# Altium PCB PCB of SMT32.PcbDoc
Units mil, origin at the board's own origin, x right, y up, seen from the top; angles counter-clockwise.
Board outline 2725 x 965 mil, 2 copper layers (Top Layer, Bottom Layer); 38 components, 26 nets, 159 pads, 97 vias.
Unrouted connection lines stored in the file: 90.
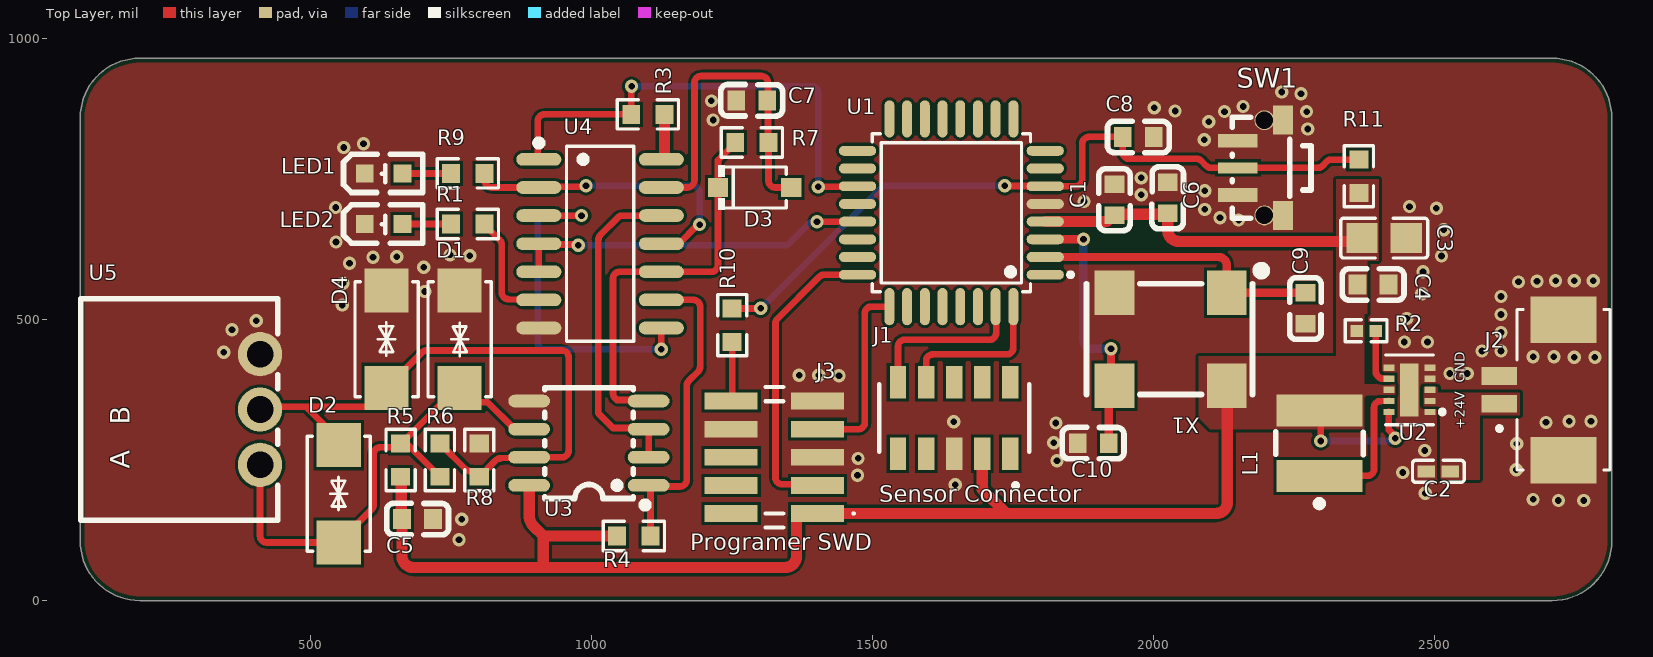
[diagram p0: Top Layer view]
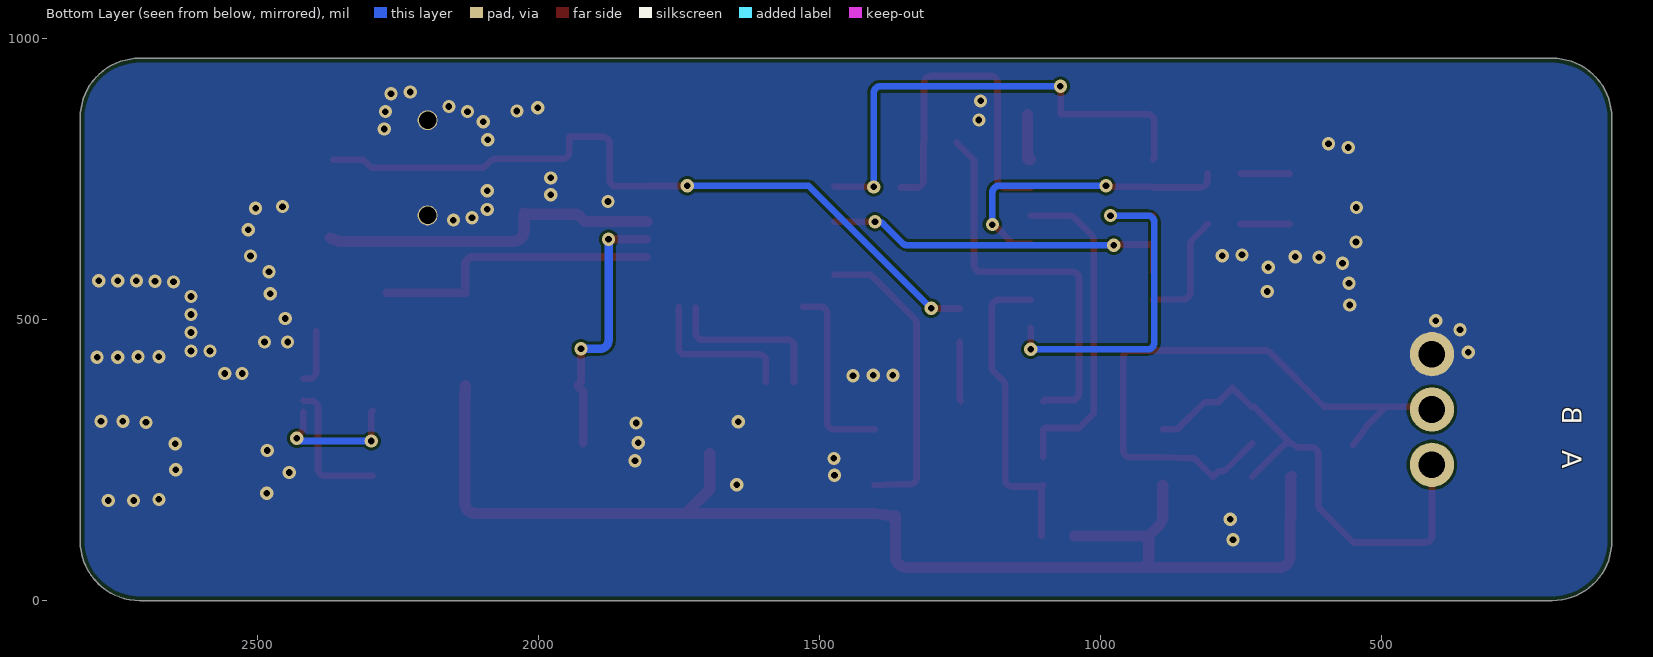
[diagram p1: Bottom Layer view, seen from below]
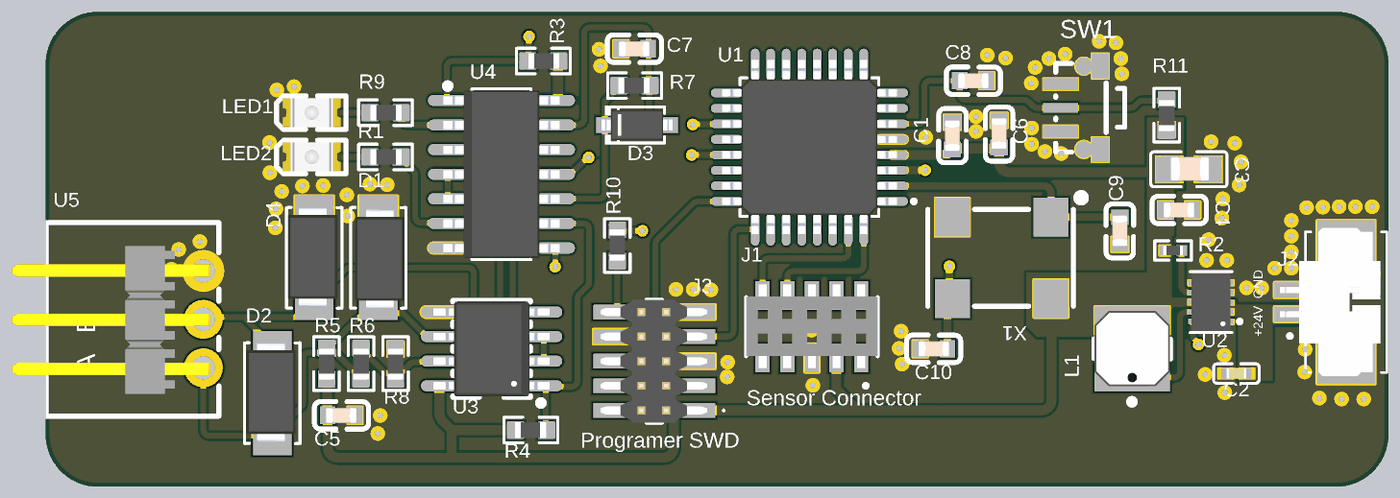
[diagram p2: 3D render of the assembled board from above, using the file's embedded part models]

## Layer stack, top to bottom
Top Solder: solder mask 0.4, Solder Resist, Dk 3.5
Top Layer: signal copper 1.4
Dielectric 1: dielectric 12.6, FR-4, Dk 4.8
Bottom Layer: signal copper 1.4
Bottom Solder: solder mask 0.4, Solder Resist, Dk 3.5

## Board outline
196,0 2709,0 ccw(c2709,106) 2815,106 2815,859 ccw(c2709,859) 2709,965 196,965 ccw(c196,859) 90,859 90,106 ccw(c196,106)

## Design rules (kind name [scope] priority, off if disabled: settings)
BoardOutlineClearance [All] p1: gap=7.87 ignorepadtopadclearanceinfootprint=FALSE
Clearance [All] p1: gap=5 ignorepadtopadclearanceinfootprint=FALSE except(9.84: Arc-Hole Track-Hole SMDPad-Hole THPad-Hole Via-Hole Fill-Hole Poly-Hole Region-Hole Text-Hole)
ComponentClearance [All] p1: gap=5 collisioncheckmode=3 verticalgap=5 showdistances=TRUE
DiffPairsRouting [All] p1: maxlimit=10 minlimit=5 mostfreqgap=5 toplayer_minwidth=5 toplayer_maxwidth=1000 toplayer_prefwidth=5 bottomlayer_minwidth=5 bottomlayer_maxwidth=1000 bottomlayer_prefwidth=5 maxuncoupledlength=500
Height [All] p1: minheight=0 maxheight=71497.94 prefheight=500
HoleSize [All] p1: absolutevalues=TRUE maxlimit=248.03 minlimit=11.81 maxpercent=80.000 minpercent=20.000
HoleToHoleClearance [All] p1: gap=9.84 allowstackedmicrovias=FALSE
MinimumAnnularRing [All] p1: minimumring=3
MinimumSolderMaskSliver [All] p1: minsoldermaskwidth=0
PlaneClearance [All] p1: clearance=5
PlaneConnect PlaneConnectPowerPads [InPadClass('PowerPads')] p1: planeconnectstyle=Direct reliefexpansion=20 reliefentries=4 reliefconductorwidth=10 reliefairgap=10
PlaneConnect [All] p2: pad.planeconnectstyle=Relief pad.reliefexpansion=11.81 pad.reliefentries=4 pad.reliefconductorwidth=5 pad.reliefairgap=5 via.planeconnectstyle=Direct via.reliefexpansion=11.81 via.reliefentries=4 via.reliefconductorwidth=5 via.reliefairgap=5
PolygonConnect PolygonConnect_3 [All vs IsNamedPolygon('NONET_L-01_P-001')] p1: connectstyle=Direct reliefconductorwidth=10 reliefentries=4 polygonreliefangle="90 Angle" airgapwidth=10
PolygonConnect PolygonConnect_2 [All vs IsNamedPolygon('NONET_L-01_P-001')] p2: connectstyle=Direct reliefconductorwidth=10 reliefentries=4 polygonreliefangle="90 Angle" airgapwidth=10
PolygonConnect PolygonConnect_1 [All vs IsNamedPolygon('NONET_L-01_P-001')] p3: connectstyle=Direct reliefconductorwidth=10 reliefentries=4 polygonreliefangle="90 Angle" airgapwidth=10
PolygonConnect PolygonConnectPowerPads [All vs (InPadClass('PowerPads'))] p4: connectstyle=Direct reliefconductorwidth=10 reliefentries=4 polygonreliefangle="90 Angle" airgapwidth=10
PolygonConnect [All] p5: thpad.connectstyle=Relief thpad.reliefconductorwidth=5 thpad.reliefentries=4 thpad.polygonreliefangle="90 Angle" thpad.airgapwidth=5 smdpad.connectstyle=Relief smdpad.reliefconductorwidth=5 smdpad.reliefentries=4 smdpad.polygonreliefangle="90 Angle" smdpad.airgapwidth=5 via.connectstyle=Direct via.reliefconductorwidth=5 via.reliefentries=4 via.polygonreliefangle="90 Angle" via.airgapwidth=5
RoutingVias [All] p1: holewidth=11.81 width=23.62 viastyle="Through Hole" minholewidth=11.81 minwidth=23.62 maxholewidth=23.62 maxwidth=259.84
SilkToSilkClearance [All] p1: silktosilkclearance=0
SilkToSolderMaskClearance [IsPad] p1: minsilkscreentomaskgap=5 clearancetoexposedcopper=TRUE
SolderMaskExpansion [All] p1: expansion=2.95 istentingtop=FALSE
Width [All] p1: maxlimit=1000 minlimit=5 preferedwidth=5 minimp=50.000000 maximp=50.000000 favimp=50.000000
20 further rules are at their usual default settings.

## Classes and differential pairs
component class SoC: C1 C6 C8 C9 C10 J3 R10 R11 SW1 U1 X1
component class Buck_Converter: C2 C3 C4 C5 C7 D1 D2 D3 D4 J1 J2 L1 LED1 LED2 R1 R2 R3 R4 R5 R6 R7 R8 R9 U2 U3 U4 U5

## Components (designator, comment, footprint, x,y, rotation, side; value= is the part's Value field where it differs from the comment)
C1 "100nF" "CAP 100NF 16V" 1930,713 r270 top
C2 "2.2uF" "CAP 2.2UF" 2506.46,230 r0 top
C3 "22uF" "CAP 22UF" 2410,645 r180 top
C4 "1uF" "CAP 1UF" 2390.06,562.5 r180 top
C5 "1uF" "CAP 1UF" 690,145 r180 top
C6 "4.7uF" "CAP 4.7UF" 2025,716.84 r90 top
C7 "100pF" "CAP 100PF" 1285,890 r0 top
C8 "100nF" "CAP 100NF 16V" 1972.45,825 r180 top
C9 "10pF" "CAP 10PF" 2270,520 r90 top
C10 "10pF" "CAP 10PF" 1892.44,280 r0 top
D1 "SMAJ58CA" "TVS DIODE" 765,465 r90 top
D2 "SMAJ58CA" "TVS DIODE" 550,190 r270 top
D3 "1N4148W" 1N4148W 1290,735 r0 top
D4 "SMAJ58CA" "TVS DIODE" 635,465 r270 top
J1 "CLP-105-02-L-D" "SESNOR CONNECTOR" 1645,325 r0 top
J2 "Power Connector" "POWER CONNECTOR" 2615,375 r90 top
J3 "20021121-00010C4LF" JTAG 1325,255 r90 top
L1 "LPS4018-103MRC" INDUCTOR 2295,280 r90 top
LED1 "VLMS1300-GS08" LED 630,760 r0 top
LED2 "VLMS1300-GS08" LED 630,670 r0 top
R1 "470Ω" "RES 470R" 779.65,670 r0 top
R2 "100K" "RES 100K" 2377.96,480 r180 top value=100kΩ
R3 "4.7K" "RES 4.7K" 1100,865 r0 top value=4.7kΩ
R4 "4.7K" "RES 4.7K" 1075,115 r180 top value=4.7kΩ
R5 "4.7K" "RES 4.7K" 660,250 r270 top value=4.7kΩ
R6 "120R" "RES 120R" 730,250 r270 top value=120Ω
R7 "56K" "RS 56K" 1285,815 r180 top value=56kΩ
R8 "4.7K" "RES 4.7K" 800,250 r270 top value=4.7kΩ
R9 "470Ω" "RES 470R" 779.65,760 r0 top
R10 "10k" "RES 10K" 1250,490 r90 top
R11 "10k" "RES 10K" 2365,755 r270 top
SW1 "TSA020B3418A02" "PUSH BUTTON" 2190,770 r90 top
U1 "STM32G030K8T6" STM32G030K8T6 1640,690 r90 top
U2 "TPS62177DQCR" TPS62177DQCR 2455,375 r90 top
U3 "ST3485EBDR" ST3485EBDR 995,280 r90 top
U4 "74HC14D,653" 74HC14D 1015,635 r270 top
U5 "733-363" "RS485 CONNECTOR" 410,340.01 r270 top
X1 "32Mhz" "CRYSTAL 32MHZ" 2030,465 r180 top value=32MHz

## Footprints (in the part's own frame and the unit in brackets; to place one, negate y for a bottom-side part, rotate by r counter-clockwise, add the part's x,y. Pads: shape width x height; smd on the part's side, far side on the other; paste and mask are expansions set on the pad)
1N4148W [mm]
  rect 0.91x0.84 smd paste+0 mask+0.051: 1(-1.655,0) 2(1.655,0)
  silkscreen extent -1.65,-1 1.43,1, body extent -1.83,-0.77 1.83,0.77, height 1.45
74HC14D [mil]
  oval 22.6x80.24 smd paste+0 mask+2: 1(-150,-109.02) 2(-100,-109.02) 3(-50,-109.02) 4(0,-109.02) 5(50,-109.02) 6(100,-109.02) 7(150,-109.02) 8(150,109.01) 9(100,109.01) 10(50,109.01) 11(0,109.01) 12(-50,109.01) 13(-100,109.01) 14(-150,109.01)
  silkscreen extent -185,-115 173,60, body extent -170,-118 171,118, height 69
"CAP 1UF" [mm]
  rect 0.8x0.9 smd paste+0 mask+0.051: 1(-0.7,0) 2(0.7,0)
  silkscreen extent -1.41,-0.71 1.39,0.72, body extent -0.8,-0.39 0.8,0.41, height 0.81
"CAP 2.2UF" [mm]
  rect 0.79x0.54 smd paste-100 mask+0.051: 1(-0.545,0) 2(0.545,0)
  silkscreen extent -1.17,-0.5 1.17,0.5, body extent -0.5,-0.27 0.5,0.28, height 0.5
"CAP 4.7UF" [mm]
  rect 0.8x0.9 smd paste+0 mask+0.051: 1(-0.7,0) 2(0.7,0)
  silkscreen extent -1.41,-0.71 1.39,0.72, body extent -0.77,-0.4 0.83,0.4, height 0.81
"CAP 10PF" [mm]
  rect 0.8x0.9 smd paste+0 mask+0.051: 1(-0.7,0) 2(0.7,0)
  silkscreen extent -1.41,-0.71 1.39,0.72, body extent -0.8,-0.4 0.8,0.4, height 0.81
"CAP 22UF" [mm]
  rect 1.41x1.35 smd paste-100 mask+0.051: 1(-1,0) 2(1,0)
  silkscreen extent -1.96,-0.9 1.96,0.9, body extent -1.05,-0.65 0.95,0.6, height 0.61
"CAP 100NF 16V" [mm]
  rect 0.8x0.9 smd paste+0 mask+0.051: 1(-0.7,0) 2(0.7,0)
  silkscreen extent -1.41,-0.71 1.39,0.72, body extent -0.81,-0.4 0.79,0.4, height 0.81
"CAP 100PF" [mm]
  rect 0.8x0.9 smd paste+0 mask+0.051: 1(-0.7,0) 2(0.7,0)
  silkscreen extent -1.41,-0.71 1.39,0.72, body extent -0.81,-0.41 0.79,0.39, height 0.81
"CRYSTAL 32MHZ" [mm]
  rect 1.8x2 smd paste+0 mask+0.051: 1(-2.54,-2.1) 2(2.54,-2.1) 3(2.54,2.1) 4(-2.54,2.1)
  silkscreen extent -4.3,-3.3 3.8,2.5
INDUCTOR [mm]
  rect 1.45x3.9 smd paste+0 mask+0.051: 1(-1.475,0) 2(1.475,0)
  silkscreen extent -2.88,-1.97 0.52,1.97, body extent -1.93,-1.95 1.97,1.95, height 1.8
JTAG [mm]
  rect 0.76x2.4 smd: 1(-2.54,-1.95) 2(-2.54,1.95) 3(-1.27,-1.95) 4(-1.27,1.95) 5(0,-1.95) 6(0,1.95) 7(1.27,-1.95) 8(1.27,1.95) 9(2.54,-1.95) 10(2.54,1.95)
  silkscreen extent -3.17,-3.63 3.17,0.4, body extent -3.17,-2.72 3.17,2.78, height 4.55
LED [mm]
  rect 0.8x0.8 smd paste+0 mask+0.051: 1(0.851,0) 2(-0.851,0)
  silkscreen extent -1.82,-0.86 1.77,0.86, body extent -1.5,-0.75 1.5,0.75, height 1.5
"POWER CONNECTOR" [mm]
  rect 0.8x1.6 smd: 1(-0.625,0) 2(0.625,0)
  rect 2.1x3 smd: S1(-3.175,-2.9) S2(3.175,-2.9)
  silkscreen extent -3.62,-5 3.62,0.1, body extent -3.83,-4.67 3.83,0.53, height 3.4
"PUSH BUTTON" [mm]
  rect 0.625x1.8 smd paste-100 mask+0.051: 1(-1.225,1.025) 3(1.225,1.025)
  rect 0.5x1.8 smd paste-100 mask+0.051: 2(0,1.025)
  rect 1.3x0.9 smd paste-100 mask+0.051: 4(-2.159,-1.025) 5(2.159,-1.025)
  round 0.9 hole 0.8 paste-2539.97 mask+0.05: 6(2.15,-0.175) 7(-2.15,-0.175)
  silkscreen extent -2.29,-2.28 2.29,1.27
"RES 4.7K" [mil]
  rect 31.75x34.02 smd paste-3937.01 mask+2: 1(-29.66,0) 2(29.66,0)
  silkscreen extent -55,-26 55,26, body extent -30,-16 32,16, height 18
"RES 10K" [mil]
  rect 31.75x34.02 smd paste-3937.01 mask+2: 1(-29.66,0) 2(29.66,0)
  silkscreen extent -55,-26 55,26, body extent -30,-16 32,16, height 18
"RES 100K" [mm]
  rect 0.566x0.54 smd paste-100 mask+0.051: 1(-0.433,0) 2(0.433,0)
  silkscreen extent -0.94,-0.5 0.94,0.5, body extent -0.5,-0.25 0.5,0.25, height 0.35
"RES 120R" [mil]
  rect 31.75x34.02 smd paste-3937.01 mask+2: 1(-29.66,0) 2(29.66,0)
  silkscreen extent -55,-26 55,26, body extent -30,-16 32,16, height 18
"RES 470R" [mil]
  rect 31.75x34.02 smd paste-3937.01 mask+2: 1(-29.65,0) 2(29.65,0)
  silkscreen extent -55,-26 55,26, body extent -30,-16 32,16, height 18
"RS485 CONNECTOR" [mm]
  round 2 hole 1.2: 1(-2.5,0) 2(0,0) 3(2.5,0)
  silkscreen extent -5,-8.1 5,0.8, body extent -3.78,-9.86 3.84,0.36, height 3
"RS 56K" [mil]
  rect 31.75x34.02 smd paste-3937.01 mask+2: 1(-29.66,0) 2(29.66,0)
  silkscreen extent -55,-26 55,26, body extent -30,-16 32,16, height 18
"SESNOR CONNECTOR" [mm]
  rect 0.74x1.47 smd: 1(2.54,-1.615) 2(2.54,1.615) 3(1.27,-1.615) 4(1.27,1.615) 5(0,-1.615) 6(0,1.615) 7(-1.27,-1.615) 8(-1.27,1.615) 9(-2.54,-1.615) 10(-2.54,1.615)
  silkscreen extent -3.39,-3.15 3.39,1.53, body extent -3.39,-2.13 3.39,2.18, height 2.29
ST3485EBDR [mil]
  oval 22.6x74.33 smd: 1(-75,-106.26) 2(-25,-106.26) 3(25,-106.26) 4(75,-106.26) 5(75,106.26) 6(25,106.26) 7(-25,106.26) 8(-75,106.26)
  silkscreen extent -116,-106 98,79, body extent -96,-118 96,118, height 69
STM32G030K8T6 [mm]
  oval 0.448x1.684 smd paste+0 mask+0.051: 1(-2.8,-4.242) 2(-2,-4.242) 3(-1.2,-4.242) 4(-0.4,-4.242) 5(0.4,-4.242) 6(1.2,-4.242) 7(2,-4.242) 8(2.8,-4.242) 17(2.8,4.242) 18(2,4.242) 19(1.2,4.242) 20(0.4,4.242) 21(-0.4,4.242) 22(-1.2,4.242) 23(-2,4.242) 24(-2.8,4.242)
  oval 1.684x0.448 smd paste+0 mask+0.051: 9(4.242,-2.8) 10(4.242,-2) 11(4.242,-1.2) 12(4.242,-0.4) 13(4.242,0.4) 14(4.242,1.2) 15(4.242,2) 16(4.242,2.8) 25(-4.242,2.8) 26(-4.242,2) 27(-4.242,1.2) 28(-4.242,0.4) 29(-4.242,-0.4) 30(-4.242,-1.2) 31(-4.242,-2) 32(-4.242,-2.8)
  silkscreen extent -3.58,-5.48 3.58,3.58, body extent -4.5,-4.5 4.5,4.5, height 1.6
TPS62177DQCR [mm]
  rect 0.28x0.505 smd paste+0 mask+0.051: 1(-1,-0.928) 2(-0.5,-0.928) 3(0,-0.928) 4(0.5,-0.928) 5(1,-0.928) 6(1,0.928) 7(0.5,0.928) 8(0,0.928) 9(-0.5,0.928) 10(-1,0.928)
  rect 2.4x0.84 smd paste+0 mask+0.051: 11(0,0)
  silkscreen extent -1.58,-1.58 1.58,1.08, body extent -1.5,-1 1.5,1, height 0.8
"TVS DIODE" [mm]
  rect 2x2 smd: 1(-2.2,0) 2(2.2,0)
  silkscreen extent -2.6,-1.43 2.6,1.43, body extent -2.62,-1.36 2.52,1.2, height 2.5

## Part data
C1 C8: library part "Cap 100nF", "16V 100nF X7R ±10% 0603 Multilayer Ceramic Capacitors MLCC - SMD/SMT ROHS", JLCPCB Part Class="Extended Part", Manufacturer=muRata(村田), Manufacturer Part=GRM188R71C104KA01D, nameAlias=Value, spicePre=C, spiceSymbolName=GRM188R71C104KA01D, Supplier=LCSC, Supplier Part=C45000
C2: library part GRM155R6YA225KE11D, "Cap 2.2uF 35V", JLCPCB Part Class="Extended Part", LCSC Part Name="2.2uF ±10% 35V", Manufacturer=muRata(村田), Tolerance=±10%, Add into BOM=yes, Convert to PCB=yes, Datasheet=https://atta.szlcsc.com/upload/public/pdf/source/20200305/C490387_23319AE8C154DEB24C505E6C82A8106A.pdf, Device=GRM155R6YA225KE11D, Manufacturer Part=GRM155R6YA225KE11D, Supplier=LCSC, Supplier Footprint=0402, Supplier Part=C237392, Symbol=GRM155R6YA225KE11D
C3: library part GRM21BC81C226ME44L, "Cap 22uF 16V", JLCPCB Part Class="Extended Part", LCSC Part Name="22uF ±20% 16V", Manufacturer=muRata(村田), Tolerance=±20%, Add into BOM=yes, Convert to PCB=yes, Datasheet=https://atta.szlcsc.com/upload/public/pdf/source/20200117/C258782_354729B55DBAD136BAA783E298FE5367.pdf, Device=GRM21BC81C226ME44L, Manufacturer Part=GRM21BC81C226ME44L, Supplier=LCSC, Supplier Footprint=0805, Supplier Part=C258782, Symbol=GRM21BC81C226ME44L
C4 C5: library part GCM188R71C105KA64D, "Cap 1uF 16V", JLCPCB Part Class="Extended Part", LCSC Part Name="1uF ±10% 16V", Manufacturer=muRata(村田), Tolerance=±10%, Add into BOM=yes, Convert to PCB=yes, Datasheet=https://atta.szlcsc.com/upload/public/pdf/source/20181221/C161212_C96DD77354D5551432B3B7779E4D1948.pdf, Device=GCM188R71C105KA64D, Manufacturer Part=GCM188R71C105KA64D, Supplier=LCSC, Supplier Footprint=0603, Supplier Part=C161212, Symbol=GCM188R71C105KA64D
C6: library part GRM188C71C475KE21D, "16V 4.7uF X7S ±10% 0603 Multilayer Ceramic Capacitors MLCC - SMD/SMT ROHS", JLCPCB Part Class="Extended Part", LCSC Part Name="4.7uF ±10% 16V", Manufacturer=muRata(村田), Tolerance=±10%, Add into BOM=yes, Convert to PCB=yes, Datasheet=https://atta.szlcsc.com/upload/public/pdf/source/20200305/C490387_23319AE8C154DEB24C505E6C82A8106A.pdf, Device=GRM188C71C475KE21D, Manufacturer Part=GRM188C71C475KE21D, Supplier=LCSC, Supplier Footprint=0603, Supplier Part=C237615, Symbol=GRM188C71C475KE21D
C7: "Cap 100pF 50V", JLCPCB Part Class="Extended Part", Manufacturer=muRata(村田), Manufacturer Part=GCM1885C1H101JA16D, nameAlias=Value, spicePre=C, spiceSymbolName=GCM1885C1H101JA16D, Supplier=LCSC, Supplier Part=C126543
C9 C10: library part "Cap 10pF", "25V 10pF NP0 ±5% 0603  Multilayer Ceramic Capacitors MLCC - SMD/SMT ROHS", JLCPCB Part Class="Extended Part", LCSC Part Name="10pF ±5% 25V", Manufacturer=YAGEO(国巨), Manufacturer Part=CC0603JRNPO8BN100, Tolerance=±5%, Add into BOM=yes, Convert to PCB=yes, Datasheet=https://atta.szlcsc.com/upload/public/pdf/source/20210519/C1853175_08ABFC5682B471E6C773F36F7C78F8CE.pdf, Device=CC0603JRNPO8BN100, Supplier=LCSC, Supplier Footprint=0603, Supplier Part=C1853175, Symbol=CC0603JRNPO8BN100
D1 D2 D4: library part SMAJ58CA_C148235, Breakdown Voltage=64.4V, JLCPCB Part Class="Extended Part", Manufacturer=Littelfuse(美国力特), Maximum Clamping Voltage=93.6V, Peak Pulse Current (Ipp)=4.3A, Peak Pulse Power Dissipation (Ppp)=400W, Reverse Stand-Off Voltage (Vrwm)=58V, Add into BOM=yes, Convert to PCB=yes, Datasheet=https://atta.szlcsc.com/upload/public/pdf/source/20190402/C374025_5ACE77BC72947DF13CF0CBC7F8B57228.pdf, Device=SMAJ58CA_C148235, LCSC Part Name=SMAJ58CA, Manufacturer Part=SMAJ58CA, Supplier=LCSC, Supplier Footprint=SMA(DO-214AC), Supplier Part=C148235, Symbol=SMAJ58CA_C148235, Type=TVS
D3: Forward Voltage (Vf@If)=1.25V@150mA, JLCPCB Part Class="Extended Part", LCSC Part Name="电压:100V 电流:150mA", Manufacturer=Agertech(艾吉芯), Operating Temperature=-55℃~+150℃@(Tj), Reverse Leakage Current=1uA@75V, Add into BOM=yes, Convert to PCB=yes, Datasheet=https://atta.szlcsc.com/upload/public/pdf/source/20210624/C2840961_71DFB6950E76A457E5EE196072A9BD23.pdf, Device=1N4148W_C2840961, Manufacturer Part=1N4148W, Supplier=LCSC, Supplier Footprint=SOD-123W, Supplier Part=C2840961, Symbol=1N4148W_C2840961
J1: "1.27mm 1.27mm Double Row Tin 3.3A -55℃~+125℃ 10P Standing paste 2.29mm SMD,P=1.27mm Female Headers ROHS", Package=None, Availability=Unavailable, MP=CLP-105-02-L-D, Price=None
J2: "Picoblade Connector, 2 Circuit Single Row, Right Angle Surface Mount SMT PCB", Package=None, Availability=Unavailable, MF="{'manufacturer': u'Molex'}", MP=0532610271, Price=None
J3: library part JTAG, "Headers & Wire Housings 1.27x1.27mm BTB, Hdr Unshrd, SMT, 10 Pos", Manufacturer_Name=Amphenol, Mouser Part Number=649-202112100010C4LF, Datasheet Link=https://cdn.amphenol-cs.com/media/wysiwyg/files/drawing/20021121.pdf, Geometry.Height=5.7mm, Manufacturer_Part_Number=20021121-00010C4LF, Mouser Price/Stock=https://www.mouser.co.uk/ProductDetail/Amphenol-FCI/20021121-00010C4LF?qs=iIVTEDlrHA1ddfCJGH4Nhg%3D%3D
L1: "Inductor 10uH", JLCPCB Part Class="Extended Part", Manufacturer=Coilcraft(线艺), Add into BOM=yes, Convert to PCB=yes, Datasheet=https://atta.szlcsc.com/upload/public/pdf/source/20220705/4A26DAB81CB6B332CC15AA1D7F647266.pdf, Device=LPS4018-103MRC, LCSC Part Name=LPS4018-103MRC, Manufacturer Part=LPS4018-103MRC, Supplier=LCSC, Supplier Footprint=SMD,3.9x3.9mm, Supplier Part=C6127589, Symbol=LPS4018-103MRC
LED1 LED2: "Led", JLCPCB Part Class="Extended Part", Manufacturer=VISHAY(威世), Contributor=LCSC, Manufacturer Part=VLMS1300-GS08, spicePre=L, spiceSymbolName=VLMS1300-GS08, Supplier=LCSC, Supplier Part=C83242
R1 R9: "Res 470R", JLCPCB Part Class="Extended Part", Manufacturer=PANASONIC(松下), Manufacturer Part=ERJPA3F4700V, Contributor=lcsc, nameAlias=Value, spicePre=R, spiceSymbolName=ERJPA3F4700V, Supplier=LCSC, Supplier Part=C441919
R2: library part ERA2AEB104X, "Res 100K 50V", JLCPCB Part Class="Extended Part", LCSC Part Name="100kΩ ±0.1% 63mW 薄膜电阻", Manufacturer=PANASONIC(松下), Operating Temperature Range=-55℃~+155℃, Temperature Coefficient=±25ppm/℃, Tolerance=±0.1%, Add into BOM=yes, Convert to PCB=yes, Device=ERA2AEB104X, Manufacturer Part=ERA2AEB104X, Supplier=LCSC, Supplier Footprint=0402, Supplier Part=C445619, Symbol=ERA2AEB104X, Type="Thin Film Resistor"
R3 R4 R5 R8: library part ERJPA3F4701V, "Res 4.7K", JLCPCB Part Class="Extended Part", LCSC Part Name="4.7kΩ ±1% 333mW 厚膜电阻", Manufacturer=PANASONIC(松下), Operating Temperature Range=-55℃~+155℃, Overload Voltage (Max)=-, Power(Watts)=333mW, Temperature Coefficient=±100ppm/℃, Tolerance=±1%, Add into BOM=yes, Convert to PCB=yes, Device=ERJPA3F4701V, Manufacturer Part=ERJPA3F4701V, Supplier=LCSC, Supplier Footprint=0603, Supplier Part=C441924, Symbol=ERJPA3F4701V, Type="Thick Film Resistors"
R6: library part ERJPA3F1200V, "Res 120R", JLCPCB Part Class="Extended Part", LCSC Part Name="120Ω ±1% 250mW 厚膜电阻", Manufacturer=PANASONIC(松下), Operating Temperature Range=-55℃~+155℃, Overload Voltage (Max)=-, Power(Watts)=250mW, Temperature Coefficient=±100ppm/℃, Tolerance=±1%, Add into BOM=yes, Convert to PCB=yes, Datasheet=https://atta.szlcsc.com/upload/public/pdf/source/20200515/C543414_D3FB4A44C151AC19BA141503575FC797.pdf, Device=ERJPA3F1200V, Manufacturer Part=ERJPA3F1200V, Supplier=LCSC, Supplier Footprint=0603, Supplier Part=C543338, Symbol=ERJPA3F1200V, Type="Thick Film Resistors"
R7: library part ERJ3EKF5602V, "Res 56K", JLCPCB Part Class="Extended Part", LCSC Part Name="56kΩ ±1% 100mW 厚膜电阻", Manufacturer=PANASONIC(松下), Operating Temperature Range=-55℃~+155℃, Overload Voltage (Max)=-, Temperature Coefficient=±100ppm/℃, Tolerance=±1%, Add into BOM=yes, Convert to PCB=yes, Datasheet=https://atta.szlcsc.com/upload/public/pdf/source/20181114/C278629_181D62B106189050D6A2EF7256E211B4.pdf, Device=ERJ3EKF5602V, Manufacturer Part=ERJ3EKF5602V, Supplier=LCSC, Supplier Footprint=0603, Supplier Part=C278629, Symbol=ERJ3EKF5602V, Type="Thick Film Resistors"
R10 R11: library part ERJ-PA3F1002V_1, "RES SMD 10K OHM 1% 1/4W 0603", Digi-Key Part Number=P10KBYCT-ND, Manufacturer="Panasonic Electronic Components", Operating Temperature="-55°C ~ 155°C", Package / Case="0603 (1608 Metric)", Part Number=ERJ-PA3F1002V, Power (Watts)="0.25W, 1/4W", Supplier Device Package=0603, Temperature Coefficient=±100ppm/°C, Tolerance=±1%, @ qty=1500, Composition="Thick Film", Datasheets=https://industrial.panasonic.com/cdbs/www-data/pdf/RDA0000/AOA0000C243.pdf, Factory Stock=0, Failure Rate=-, Features="Automotive AEC-Q200, Pulse Withstanding", Height - Seated (Max)="0.022\" (0.55mm)", Image=//media.digikey.com/Photos/Panasonic%20Photos/MFG_ERJ-P6W%20Series.jpg, Minimum Quantity=1, Number of Terminations=2, Packaging="Cut Tape (CT)", Part Status=Active, Quantity Available=12488, Series=ERJ, Size / Dimension="0.063\" L x 0.031\" W (1.60mm x 0.80mm)", Unit Price (USD)=0.02372
SW1: library part "Push Button", Contact Current=50mA, JLCPCB Part Class="Extended Part", LCSC Part Name="4.5*3.4*3.4mm 卧贴 轻触开关", Manufacturer=BZCN(博众电气), Operating Force=180gf, Voltage Rating (AC)=-, Voltage Rating (DC)=12V, Actuator Style="Round Button", Add into BOM=yes, Convert to PCB=yes, Datasheet=https://atta.szlcsc.com/upload/public/pdf/source/20210826/A0412DE55436A0A9154118D90A036ADB.pdf, Device=TSA020B3418A02, Manufacturer Part=TSA020B3418A02, Mechanical Life=-, Mounting Style="Surface Mount", Supplier=LCSC, Supplier Footprint=SMD, Supplier Part=C2888897, Switch Height=3.4mm, Switch Length=4.5mm, Switch Width=3.4mm, Symbol=TSA020B3418A02
U1: JLCPCB Part Class="Extended Part", Manufacturer=ST(意法半导体), Contributor=LCSC, Manufacturer Part=STM32G030K8T6, spicePre=U, spiceSymbolName=STM32G030K8T6, Supplier=LCSC, Supplier Part=C431631
U2: Input Voltage=-, JLCPCB Part Class="Extended Part", Manufacturer=TI(德州仪器), Add into BOM=yes, Convert to PCB=yes, Datasheet=https://www.ti.com/cn/lit/gpn/tps62177, Device=TPS62177DQCR, Function="Step-down type", LCSC Part Name=TPS62177DQCR, Manufacturer Part=TPS62177DQCR, Number of Outputs=-, Output Current (Max)=-, Supplier=LCSC, Supplier Footprint=WSON-10-EP(2x3), Supplier Part=C91241, Switch tube (built-in/external)=内置, Switching Frequency=-, Symbol=TPS62177DQCR, Synchronous Rectification=-, Topology=-
U3: JLCPCB Part Class="Extended Part", LCSC Part Name="3.3V供电 15Mbps 带静电保护收发器", Manufacturer=ST(意法半导体), Operating Temperature=-40℃~+85℃, Supply Voltage=3V~3.6V, Add into BOM=yes, Convert to PCB=yes, Data Rate=15Mbps, Datasheet=https://atta.szlcsc.com/upload/public/pdf/source/20181012/C75809_EC9EE9FC1B4AC7950854237FAEE73CA1.pdf, Device=ST3485EBDR, Driver/receiver=1/1, ESD Protect=±12kV, Manufacturer Part=ST3485EBDR, Node Number=64, Supplier=LCSC, Supplier Footprint=SO-8, Supplier Part=C75809, Symbol=ST3485EBDR, Types=transceiver, Whether the isolation=NO
U4: JLCPCB Part Class="Basic Part", Manufacturer=Nexperia(安世), Manufacturer Part=74HC14D,653, spicePre=X, spiceSymbolName=74HC14D,653, Supplier=LCSC, Supplier Part=C5605
U5: library part "RS485 Connector", "6A 3 Straight Needle -60℃~+100℃ 1 2.5mm Gray Plugin,P=2.5mm  Pluggable System Terminal Block ROHS", Color=Gray, Current Rating (Max)=6A, JLCPCB Part Class="Extended Part", LCSC Part Name="2.5mm 排数:1 每排P数:3", Manufacturer=WAGO(万可), Operating Temperature Range=-60℃~+100℃, Add into BOM=yes, Convert to PCB=yes, Datasheet=https://atta.szlcsc.com/upload/public/pdf/source/20240407/CB0328B38B61B769306C444AB4F51080.pdf, Device=733-363, Manufacturer Part=733-363, Mounting Style="Straight Needle", Number of Pins=3P, Number of PINs Per Row=3, Number of Rows=1, Pitch=2.5mm, Structure=-, Supplier=LCSC, Supplier Footprint=插件,P=2.5mm, Supplier Part=C3579942, Symbol=733-363
X1: library part Crystal, Frequency Stability(Full temperature range)=±100ppm, JLCPCB Part Class="Extended Part", LCSC Part Name=X1G0044810009, Manufacturer=EPSON(爱普生), Operating Temperature=-40℃~+85℃, Supply Current (Max)=3mA, Supply Voltage=1.6V~3.6V, Add into BOM=yes, Convert to PCB=yes, Datasheet=https://atta.szlcsc.com/upload/public/pdf/source/20161110/1478747518408.pdf, Device=X1G0044810009, Manufacturer Part=X1G0044810009, Supplier=LCSC, Supplier Footprint=SMD7050-4P, Supplier Part=C70524, Symbol=X1G004481000900

## Via types
v1: diameter 23.62, hole 11.81, Top Layer to Bottom Layer, 97 vias

## Nets (pads, with @x,y where several pads share a name; then routed paths per layer and width w, separated by ;. In a path a pad name is that pad's centre, name@x,y a point inside that pad or via, vN(x,y) a via of type N, cw(c..) or ccw(c..) an arc to the next point about the centre after c; other vN are vias at no path point)
+3V3: C1.2 C3.2 C4.2 C5.2 C6.1 J1.3 J3.1 L1.2 R2.2 R3.2 R4.2 R5.2 R11.2 U1.4 U2.8 U2.10 U3.8 U4.14 X1.4 | length 3273.3
  Top Layer w11.81: L1.2 2297,336.08 v1(2297,284) ; U2.10 2418.48,303.3 2429.73,292.04 v1(2429.73,288.85)
  Top Layer w20: R5.2 661.22,219.12 661.22,146.22 C5.2 662.44,78.95 ccw(c682.44,79) 682.44,59 914,59 ; U3.8 888.74,150.66 ccw(c908.74,150.66) 890.18,143.21 891.59,139.69 ccw(c910.15,147.13) 896,133 914,115 ; R4.2 914,115 ; U4.14 1128.46,785 1129.66,786.2 R3.2 ; J1.3 1695,198 1736,157 1734,155 ; U1.4 1916.84,674.25 1928.03,685.44 C1.2 1931.91,687.36 2023.09,687.36 C6.1 2025,659 ccw(c2045,659) 2045,639 2352.87,639 C3.2 ; X1.4 2131,352.95 2131,175 cw(c2111,175) 2111,155 1734,155 ; 914,59 914,115 ; 914,59 1344.53,59 ccw(c1344.53,79) 1364.53,79 1364.53,150.04 J3.1 1734,155
  Bottom Layer w11.81: v1(2297,284) 2421.69,284 2426.54,288.85 v1(2429.73,288.85)
+24V: C2.2 J2.1 U2.2 U2.3
GND: C1.1 C2.1 C3.1 C4.1 C5.1 C6.2 C7.1 C8.1 C9.1 C10.1 D1.2 D4.1 J1.5 J2.2 J2.S1 J2.S2 J3.5 J3.8 J3.9 LED1.2 LED2.2 R8.1 SW1.1 SW1.3 SW1.4 SW1.5 SW1.6 SW1.7 U1.5 U2.1 U2.4 U2.5 U2.6 U2.11 U3.5 U4.7 U5.1 X1.2
  other v1: 764,108 768.98,144.55 2720,178 2765,178 2675,180 2483,191 1647,206 1473,223 2443,228 2645,233 1828,249 1474,253 2482,267 2646,279 1822,281 1826,316 2698,317 1644,318 2739,319 2778,319 1440,400 1369,401 1404,401 2527,404 2558,404 2748,433 2785,433 2675,434 2712,434 345.4,441.84 2584,444 2618,444 2446,460 2487,460 2618,477 360,482 402.98,498.08 2450,502 2618,509 556,526 2618,541 2477,546 703,550 557.47,564.48 2649,567 2682,568 2715,569 2748,569 2782,569 2479,585 701.18,592.86 569,600 611,611 653,612 2512,613 783.17,613.58 748,615 545,638 2516,660 2151,677 2118,681 2091,696 2503,698 544.36,699.31 2455,701 1876,710 1978,722 2091,729 1978,752 559.08,806.15 594,813 2090,820 2274,839 2098,852 1216,855 2126,870 2272,870 2038,871 2001,877 2159,879 1213,889 2262,902 2228,905
NetC7_2: C7.2 D3.2 R7.1 U4.13 | length 606.2
  Top Layer w11.81: U4.13 1170.11,735 ccw(c1170.11,746.81) 1178.43,738.43 1179.43,739.43 ccw(c1171.05,747.75) 1182.86,747.75 1182.86,921.44 cw(c1194.67,921.44) 1194.67,933.26 1301.8,933.26 cw(c1301.8,921.44) 1313.61,921.44 1313.61,890 1313.61,816.05 R7.1 1314.66,746.81 ccw(c1326.47,746.81) 1326.43,735 D3.2
NetD3_1: D3.1 R7.2 U3.4 U4.10 | length 706.9
  Top Layer w11.81: U3.4 1099.32,356.94 1044.92,356.94 1041.46,360.4 cw(c1049.81,368.75) 1038,368.75 1038,573.19 cw(c1049.81,573.19) 1049.81,585 1213.03,585 ccw(c1213.03,596.81) 1224.84,596.81 1224.84,783.37 1255.34,813.87 R7.2
NetJ3_10: J3.10 R10.1 | length 106.1
  Top Layer w11.81: J3.10 1250,356.77 R10.1
NetL1_1: L1.1 U2.9 | length 246.3
  Top Layer w11.81: L1.1 2380.19,221.92 ; 2380.19,221.93 ccw(c2380.19,233.74) 2392,233.74 2392,343.12 cw(c2403.81,343.12) 2403.5,354.92 U2.9
NetLED1_1: LED1.1 R9.1 | length 86.5
  Top Layer w11.81: LED1.1 R9.1
NetLED2_1: LED2.1 R1.1 | length 86.5
  Top Layer w11.81: LED2.1 R1.1
NetR1_2: R1.2 U4.6 | length 206.4
  Top Layer w11.81: R1.2 819.28,658.9 836.57,641.61 cw(c828.19,633.29) 840,633.29 840,548.27 ccw(c851.81,548.27) 851.49,536.46 U4.6
NetR2_1: R2.1 U2.7 | length 102.9
  Top Layer w11.81: R2.1 2395,407.89 ccw(c2406.81,407.89) 2398.46,399.54 2399.88,398.12 ccw(c2408.2,406.5) 2408.2,394.69 U2.7
NetR4_1: R4.1 U3.1 U4.9 | length 556.9
  Top Layer w11.81: U3.1 U3.1@1103.26,203 ; R4.1 1104.66,201.6 U3.1@1103.26,203 ; U4.9 1181.19,535 cw(c1181.19,523.19) 1193,523.19 1193,415.89 cw(c1181.19,415.89) 1189.54,407.54 1172.46,390.46 ccw(c1180.81,382.11) 1169,382.11 1169,214.81 cw(c1157.19,214.81) 1157.19,203 U3.1@1103.26,203
NetR9_2: R9.2 U4.2 U4.11 | length 549.1
  Top Layer w11.81: R9.2 809.31,748.03 ccw(c821.12,748.03) 812.78,739.67 814.01,738.44 ccw(c822.34,746.81) 822.34,735 U4.2 907.48,736.5 988.5,736.5 v1(990,738) ; U4.11 1155.42,635 1189.42,669 v1(1192,669)
  Bottom Layer w11.81: v1(990,738) 1180.19,738 cw(c1180.19,726.19) 1192,726.19 v1(1192,669)
NetU3_2: U3.2 U3.3 U4.12 | length 591.7
  Top Layer w11.81: 1011.89,617.11 1011.89,333.11 1038,307 1099.26,307 U3.3 U3.2 ; 1011.91,617.13 1011.91,642.01 cw(c1023.72,642.01) 1015.36,650.36 1046.57,681.57 cw(c1054.89,673.19) 1054.89,685 U4.12
NetU4_3: U4.3 U4.8 | length 639.9
  Top Layer w11.81: U4.3 v1(982,685) ; v1(1124,447) U4.8
  Bottom Layer w11.81: v1(982,685) 915.81,685 ccw(c915.81,673.19) 904,673.19 904,458.81 ccw(c915.81,458.81) 915.76,447 v1(1124,447)
OSC_IN: C9.2 U1.2 X1.1 | length 520.2
  Top Layer w15: U1.2 2115,611.26 cw(c2115,596.26) 2130,596.26 X1.1 2130.11,547.56 C9.2
OSC_OUT: C10.2 U1.3 X1.3 | length 480.3
  Top Layer w15: U1.3 1874.76,642.76 v1(1875,643) ; C10.2 1920,372.33 X1.3 1924,388.33 v1(1924,448)
  Bottom Layer w15: v1(1875,643) 1875,463 ccw(c1890,463) 1889.95,448 v1(1924,448)
RESET: C8.2 R10.2 R11.1 SW1.2 U1.6 | length 1328
  Top Layer w11.81: R10.2 1300.66,519.66 v1(1301,520) ; v1(1735,738) 1735.38,737.62 1806.63,737.62 U1.6 ; U1.6@1807.11,737.14 1861.19,737.14 ccw(c1861.19,748.95) 1873,748.95 1873,813.19 cw(c1884.81,813.19) 1884.81,825 C8.2 1944.89,797.81 ccw(c1956.7,797.81) 1956.7,786 2076.11,786 cw(c2076.11,774.19) 2084.43,782.57 2093.57,773.43 ccw(c2101.89,781.81) 2101.89,770 SW1.2 2291.83,770 ccw(c2291.83,781.81) 2300.18,773.46 2307.95,781.23 cw(c2316.28,772.85) 2316.28,784.66 R11.1
  Bottom Layer w11.81: v1(1301,520) 1519,738 v1(1735,738)
RS485_A: D1.1 D2.2 R5.1 R6.2 U3.6 U5.3 | length 905.8
  Top Layer w11.81: U5.3 410,115.2 ccw(c421.81,115.2) 421.77,103.39 D2.2 608.54,161.93 ccw(c600.19,170.28) 612,170.28 612,260.83 cw(c623.81,260.83) 623.77,272.64 648.9,272.64 R5.1 671.1,279.24 720.03,230.31 R6.2 ; R5.1@661.13,279.66 726.4,344.93 731.54,344.93 D1.1 790.68,352.71 815.17,352.71 862.87,305 U3.6
RS485_B: D2.1 D4.2 R6.1 R8.2 U3.7 U5.2 | length 1127.9
  Top Layer w11.81: U5.2 414.93,344.93 486.61,344.93 491.53,344.93 ; D2.1 526.38,310.07 491.53,344.93 ; R6.1 775.91,233.75 ccw(c784.24,242.12) 784.24,230.31 788.9,230.31 R8.2 829.16,249.5 cw(c837.49,241.13) 837.02,252.93 U3.7 947.19,255 ccw(c947.19,266.81) 959,266.81 959,433.19 ccw(c947.19,433.19) 947.24,445 706.5,445 ccw(c706.5,433.19) 698.15,441.54 601.54,344.93 491.53,344.93
RS485_RX: U1.21 U4.4 U4.5 | length 635.9
  Top Layer w11.81: U4.5 U4.4 907.48,633.5 974.5,633.5 v1(976,632) ; v1(1401,674) 1401,675 1401.75,674.25 U1.21
  Bottom Layer w11.81: v1(976,632) 1343.11,632 ccw(c1343.11,643.81) 1351.46,635.46 1386.57,670.57 cw(c1394.89,662.19) 1394.89,674 v1(1401,674)
RS485_TX: R3.1 U1.19 U4.1 | length 868.4
  Top Layer w11.81: U4.1 cw(c915.81,791.55) 904,791.54 904,853.23 cw(c915.81,853.19) 915.81,865 R3.1 1070.34,914.34 v1(1071,915) ; v1(1403.07,736) 1403.7,736.62 1472.37,736.62 U1.19
  Bottom Layer w11.81: v1(1071,915) 1391.26,915 cw(c1391.26,903.19) 1403.07,903.19 v1(1403.07,736)
SCL: J1.8 U1.32 | length 279.5
  Top Layer w11.81: J1.8 1595,426.19 cw(c1606.81,426.19) 1606.81,438 1738.43,438 ccw(c1738.43,449.81) 1750.24,449.81 U1.32
SDA: J1.10 U1.31 | length 298
  Top Layer w11.81: J1.10 1545,452.23 cw(c1556.81,452.19) 1556.81,464 1707.7,464 ccw(c1707.7,475.81) 1719.51,475.81 U1.31@1719.51,522.23
SWCLK: J3.7 U1.25 | length 335.8
  Top Layer w11.81: J3.7 1474.19,305 ccw(c1474.19,316.81) 1486,316.81 1486,511.18 cw(c1497.81,511.18) 1497.81,522.99 U1.25
SWDIO: J3.3 U1.24 | length 539.6
  Top Layer w11.81: J3.3 1360.43,207 1338.77,207 cw(c1338.81,218.81) 1327,218.81 1327,493.11 cw(c1338.81,493.11) 1330.46,501.46 1405.33,576.33 cw(c1413.66,567.95) 1413.66,579.76 U1.24
pads on no net: J1.1 J1.2 J1.4 J1.6 J1.7 J1.9 J3.2 J3.4 J3.6 U1.1 U1.7 U1.8 U1.9 U1.10 U1.11 U1.12 U1.13 U1.14 U1.15 U1.16 U1.17 U1.18 U1.20 U1.22 U1.23 U1.26 U1.27 U1.28 U1.29 U1.30

## Polygon pours and split planes (outlines as drawn)
GND on Top Layer "NONET_L-01_P-001" (solid, remove dead copper, pour order 3): 196,0 2709,0 ccw(c2709,106) 2815,106 2815,859 ccw(c2709,859) 2709,965 196,965 ccw(c196,859) 90,859 90,106 ccw(c196,106)
+3V3 on Top Layer "NONET_L-01_P-001" (solid, remove dead copper, pour order 2): 2375,304.53 2100.47,304.53 2080,325 2080,435 2325,435 2325,750 2400,750 2400,605 2380,605 2380,510 2375,510 2375,385 2430,385 2430,365 2379,365 2375,361
+24V on Top Layer "NONET_L-01_P-001" (solid, remove dead copper, pour order 0): 2651.5,371.14 2650.35,370 2505,370 2505,380 2480,380 2480,345 2510,345 2510,214.92 2510.55,214.37 2511.18,215 2580,215 2580,328.15 2578.5,329.65 2651.5,329.65
GND on Bottom Layer "NONET_L-01_P-001" (solid, remove dead copper, pour order 1): 196,0 2709,0 ccw(c2709,106) 2815,106 2815,859 ccw(c2709,859) 2709,965 196,965 ccw(c196,859) 90,859 90,106 ccw(c196,106)

## Silkscreen, mask and mechanical layers (free items; w line width, h text height)
Top Overlay:
  text "+24V  GND" at 2559.67,305 h30 r90
  text "A   B" at 190,235 h60 r90
  text "Sensor Connector" at 1512,165.55 h50
  text "Programer SWD" at 1175,79.38 h50
Bottom Overlay:
  text "A   B" at 190,235 h60 r90